# EAGLE board Tiny Programmer_PM (EAGLE 6.1)

Size 76.2 x 49.53 mm. Coordinates in mm from the lower left corner, seen from the top.
Outline: 2.54,0 arc-90 0,2.54 0,13.97 arc-90 2.54,16.51 5.08,16.51 arc90 7.62,19.05 7.62,30.48 arc90 5.08,33.02 2.54,33.02 arc-90 0,35.56 0,46.99 arc-90 2.54,49.53 73.66,49.53 arc-90 76.2,46.99 76.2,2.54 arc-90 73.66,0 2.54,0
Copper layers (1*16): Top 0.035mm / dielectric 1.5mm / Bottom 0.035mm
Design rules: minimum track width 8mil, minimum drill 20mil, track to track 8mil, track to pad 8mil, pad to pad 8mil, via to via 8mil, smd to smd 8mil, copper to edge 8mil, drill to drill 8mil, minimum pad ring 12mil, minimum via ring 10mil, stop-mask expansion 4mil, vias tented up to drill 20mil, thermal gap 10mil
Net classes: 1 BIG: width 0.762 mm, clearance 0.305 mm to class 0, clearance 0.305 mm
Holes 1.52 mm at 19.05,31.75 45.72,29.21 45.72,26.67 45.72,24.13 45.72,21.59 53.34,29.21 53.34,26.67 53.34,24.13 53.34,21.59 26.67,21.59 29.21,21.59 31.75,21.59 31.75,19.05 29.21,19.05 26.67,19.05

## Footprints (pad centres in the part's own frame; a part is rotated, then mirrored left to right if it is on the bottom)
STAND-OFF-TIGHTER = hole 2.794: 0,0
NUBBIN_LOCKER = hole 3.048: 0,0

## Placement (x,y rotation side)
JP7  STAND-OFFTIGHTER  [STAND-OFF-TIGHTER]  72.39,45.72 0 top
JP8  STAND-OFFTIGHTER  [STAND-OFF-TIGHTER]  3.81,3.81 0 top
JP9  STAND-OFFTIGHTER  [STAND-OFF-TIGHTER]  72.39,3.81 0 top
JP10  STAND-OFFTIGHTER  [STAND-OFF-TIGHTER]  3.81,45.72 0 top
U$1  [NUBBIN_LOCKER]  19.05,38.1 0 top
U$2  [NUBBIN_LOCKER]  49.53,38.1 0 top
U$3  [NUBBIN_LOCKER]  39.37,11.43 0 top

## Library data of the parts
JP7-JP10 = Testing
U$1-U$3 = SparkFun

## Text on the board
tPlace: Tiny Programmer Testbed | #386 | + | 3 | 2 | 4 | 1 | - | 0